# EAGLE board plugV8-Relay-NO (EAGLE 7.5.0)

Size 91.11 x 80 mm. Coordinates in mm from the lower left corner, seen from the top.
Outline: 0,0 91.11,0 91.11,80 0,80 0,0
Copper layers (1*16): Top 0.035mm / dielectric 1.5mm / Bottom 0.035mm
Design rules "default": minimum track width 10mil, minimum drill 24mil, track to track 8mil, track to pad 8mil, pad to pad 8mil, via to via 8mil, smd to smd 8mil, copper to edge 40mil, drill to drill 8mil, minimum pad ring 10mil, minimum via ring 8mil, stop-mask expansion 4mil, vias tented up to drill 0mil, thermal gap 10mil

## Footprints (pad centres in the part's own frame; a part is rotated, then mirrored left to right if it is on the bottom)
SOD-123_MINI-SMA = smd 1.5 x 2.1: A 1.8,0; C -1.8,0
SOT23-BEC = smd 1 x 1.4: B -0.95,-1.1; C 0,1.1; E 0.95,-1.1
C0805 = smd 1.3 x 1.5: 1 -0.95,0; 2 0.95,0
AK300/3 = drill 1.321 long: 1 -5.004,0; 2 0,0; 3 5.004,0
CHIPLED_0805 = smd 1.2 x 1.2: A 0,-1.05; C 0,1.05
TR5 = drill 0.813 pad 1.778 long: 1 -2.54,0; 2 2.54,0
1X03 = drill 1.016 pad 1.88: 1 0,0; 2 2.54,0; 3 5.08,0
1X08_ROUND = drill 1.016 pad 1.88: 1 0,0; 2 2.54,0; 3 5.08,0; 4 7.62,0; 5 10.16,0; 6 12.7,0; 7 15.24,0; 8 17.78,0
DIL04 = drill 0.813 offset: 1 -1.27,-3.81; 2 1.27,-3.81; 3 1.27,3.81; 4 -1.27,3.81
M0805 = smd 1.3 x 1.6: 1 -0.95,0; 2 0.95,0
SW2-5.0-6.0X3.0X4.3MM = drill 0.8 pad 1.27: 1 -2.5,0; 2 2.5,0
SOT89 = smd 0.8 x 1.4: 1 -1.524,-1.905; 3 1.524,-1.905 | smd 0.8 x 1.9: 2 0,-1.651 | smd 2.032 x 3.65: 4 0,0.94
ESP12E-SMD = smd 3 x 1.2: ADC -8.3,3.8; CH_PD -8.3,1.8; GND 8.1,-8.2; GPIO0 8.1,-2.2; GPIO2 8.1,-4.2; GPIO4 8.1,-0.2; GPIO5 8.1,1.8; GPIO12 -8.3,-4.2; GPIO13 -8.3,-6.2; GPIO14 -8.3,-2.2; GPIO15 8.1,-6.2; GPIO16 -8.3,-0.2; RESET -8.3,5.8; RXD0 8.1,3.8; TXD0 8.1,5.8; VCC -8.3,-8.2 | smd 1.2 x 3: CS0 -4.8,-10.3; GPIO9 -0.8,-10.3; GPIO10 1.2,-10.3; MISO -2.8,-10.3; MOSI 3.2,-10.3; SCLK 5.2,-10.3
HLK-PM01 = drill 1.1 pad 1.93: +5V 15.19,-7.76; GND 15.19,7.64 | drill 1.1 long: AC1 -14.21,2.44; AC2 -14.21,-2.56
RELAY-SONGLE = drill 1.3 pad 2.1: COM -8.1,0; NC 6.1,6; NO 6.1,-6; V+ -6.1,6; V- -6.1,-6

## Placement (x,y rotation side)
1N4007  [SOD-123_MINI-SMA]  -35.56,67.31 0 top  (outside the outline)
BC817  [SOT23-BEC]  -36.83,60.96 0 top  (outside the outline)
CIN  1uF  [C0805]  -60.96,50.8 0 top  (outside the outline)
CON  [AK300/3]  38.1,20.32 0 top
COUT  1uF  [C0805]  -55.88,50.8 0 top  (outside the outline)
ESP-LED  [CHIPLED_0805]  -39.37,49.53 0 top  (outside the outline)
F2  [TR5]  -17.78,52.07 0 top  (outside the outline)
J2  [1X03]  26.67,54.61 0 bottom
J3  [1X08_ROUND]  29.21,63.5 0 bottom
NEO  [1X03]  27.94,43.18 0 bottom
OC  PC817  [DIL04]  38.1,54.61 0 bottom
R1  240  [M0805]  -66.04,50.8 0 top  (outside the outline)
R2  1k  [M0805]  -30.48,62.23 0 top  (outside the outline)
R3  470  [M0805]  -15.24,62.23 0 top  (outside the outline)
R5  470  [M0805]  -20.32,62.23 0 top  (outside the outline)
R7  240  [M0805]  -25.4,62.23 0 top  (outside the outline)
RELAY-LED  [CHIPLED_0805]  -24.13,49.53 0 top  (outside the outline)
SW1  [SW2-5.0-6.0X3.0X4.3MM]  25.4,34.29 0 bottom
U1  XC6206PR  [SOT89]  -34.29,53.34 0 top  (outside the outline)
U2  [ESP12E-SMD]  59.69,15.24 0 top
U$1  HLK-PM01  [HLK-PM01]  19.05,10.16 0 bottom
U$2  RELAY-SONGLE  [RELAY-SONGLE]  11.43,29.21 0 bottom

## Library data of the parts
1N4007 = diode
BC817 = transistor-neu-to92
CIN COUT R1-R3 R5 R7 = rcl
CON = con-ptr500; OC_FARNELL: unknown; OC_NEWARK: unknown
ESP-LED RELAY-LED = led
F2 = fuse; OC_FARNELL: unknown; OC_NEWARK: unknown
J2 NEO = SparkFun-Connectors
J3 = SparkFun-Connectors; PROD_ID: CONN-08437
OC = optocoupler; MPN: PC817X4J000F; OC_FARNELL: 9707727; OC_NEWARK: 97K7059
SW1 = Seeed-OPL-Switch
U1 = IC
U2 = esp8266modules
U$1 = HLK-PM01
U$2 = Seeed-OPL-Relay

## Nets
+5V: 1N4007.C CIN.2 J2.1 OC.4 R2.1 R7.1 U1.2 U1.4 U$1.+5V U$2.V+
EN: J3.2
GND: BC817.E CIN.1 COUT.1 ESP-LED.C J2.3 J3.3 NEO.3 SW1.2 U1.1 U2.GND U2.GPIO15 U$1.GND
GPIO0: J3.5 U2.GPIO0
GPIO2: R5.2 U2.GPIO2
GPIO4: J2.2 U2.GPIO4
GPIO5: RELAY-LED.A U2.GPIO5
GPIO12: U2.GPIO12
GPIO13: U2.GPIO13
GPIO14: NEO.2 U2.GPIO14
GPIO15: J3.6
GPIO16: R1.1 U2.GPIO16
N$1: F2.2 U$1.AC1 U$2.NO
N$2: OC.3 R3.1
N$3: CON.2 U$1.AC2
N$4: CON.1 U$2.COM
N$5: BC817.B R3.2
N$6: OC.2 RELAY-LED.C
N$7: R5.1 SW1.1
N$8: ESP-LED.A R1.2
N$9: NEO.1 R7.2
N$10: CON.3 F2.1
N$13: OC.1 R2.2
N$18: 1N4007.A BC817.C U$2.V-
RST: J3.4 U2.RESET
RX: J3.8 U2.RXD0
TX: J3.7 U2.TXD0
V33: COUT.2 J3.1 U1.3 U2.CH_PD U2.VCC

## Tracks (layer width: path | path; a pad name or v marks a point on that pad's centre or on a via)
+5V  (9 unrouted)
GND  (11 unrouted)
GPIO0  (1 unrouted)
GPIO2  (1 unrouted)
GPIO4  (1 unrouted)
GPIO5  (1 unrouted)
GPIO14  (1 unrouted)
GPIO16  (1 unrouted)
N$1  (2 unrouted)
N$2  (1 unrouted)
N$3  (1 unrouted)
N$4  (1 unrouted)
N$5  (1 unrouted)
N$6  (1 unrouted)
N$7  (1 unrouted)
N$8  (1 unrouted)
N$9  (1 unrouted)
N$10  (1 unrouted)
N$13  (1 unrouted)
N$18  (2 unrouted)
RST  (1 unrouted)
RX  (1 unrouted)
TX  (1 unrouted)
V33  (4 unrouted)